# Altium PCB GaN_Driver.PcbDoc
Units mil, origin at the board's own origin, x right, y up, seen from the top; angles counter-clockwise.
Board outline 1968.5 x 1968.5 mil, 2 copper layers (Top Layer, Bottom Layer); 60 components, 34 nets, 166 pads, 272 vias.
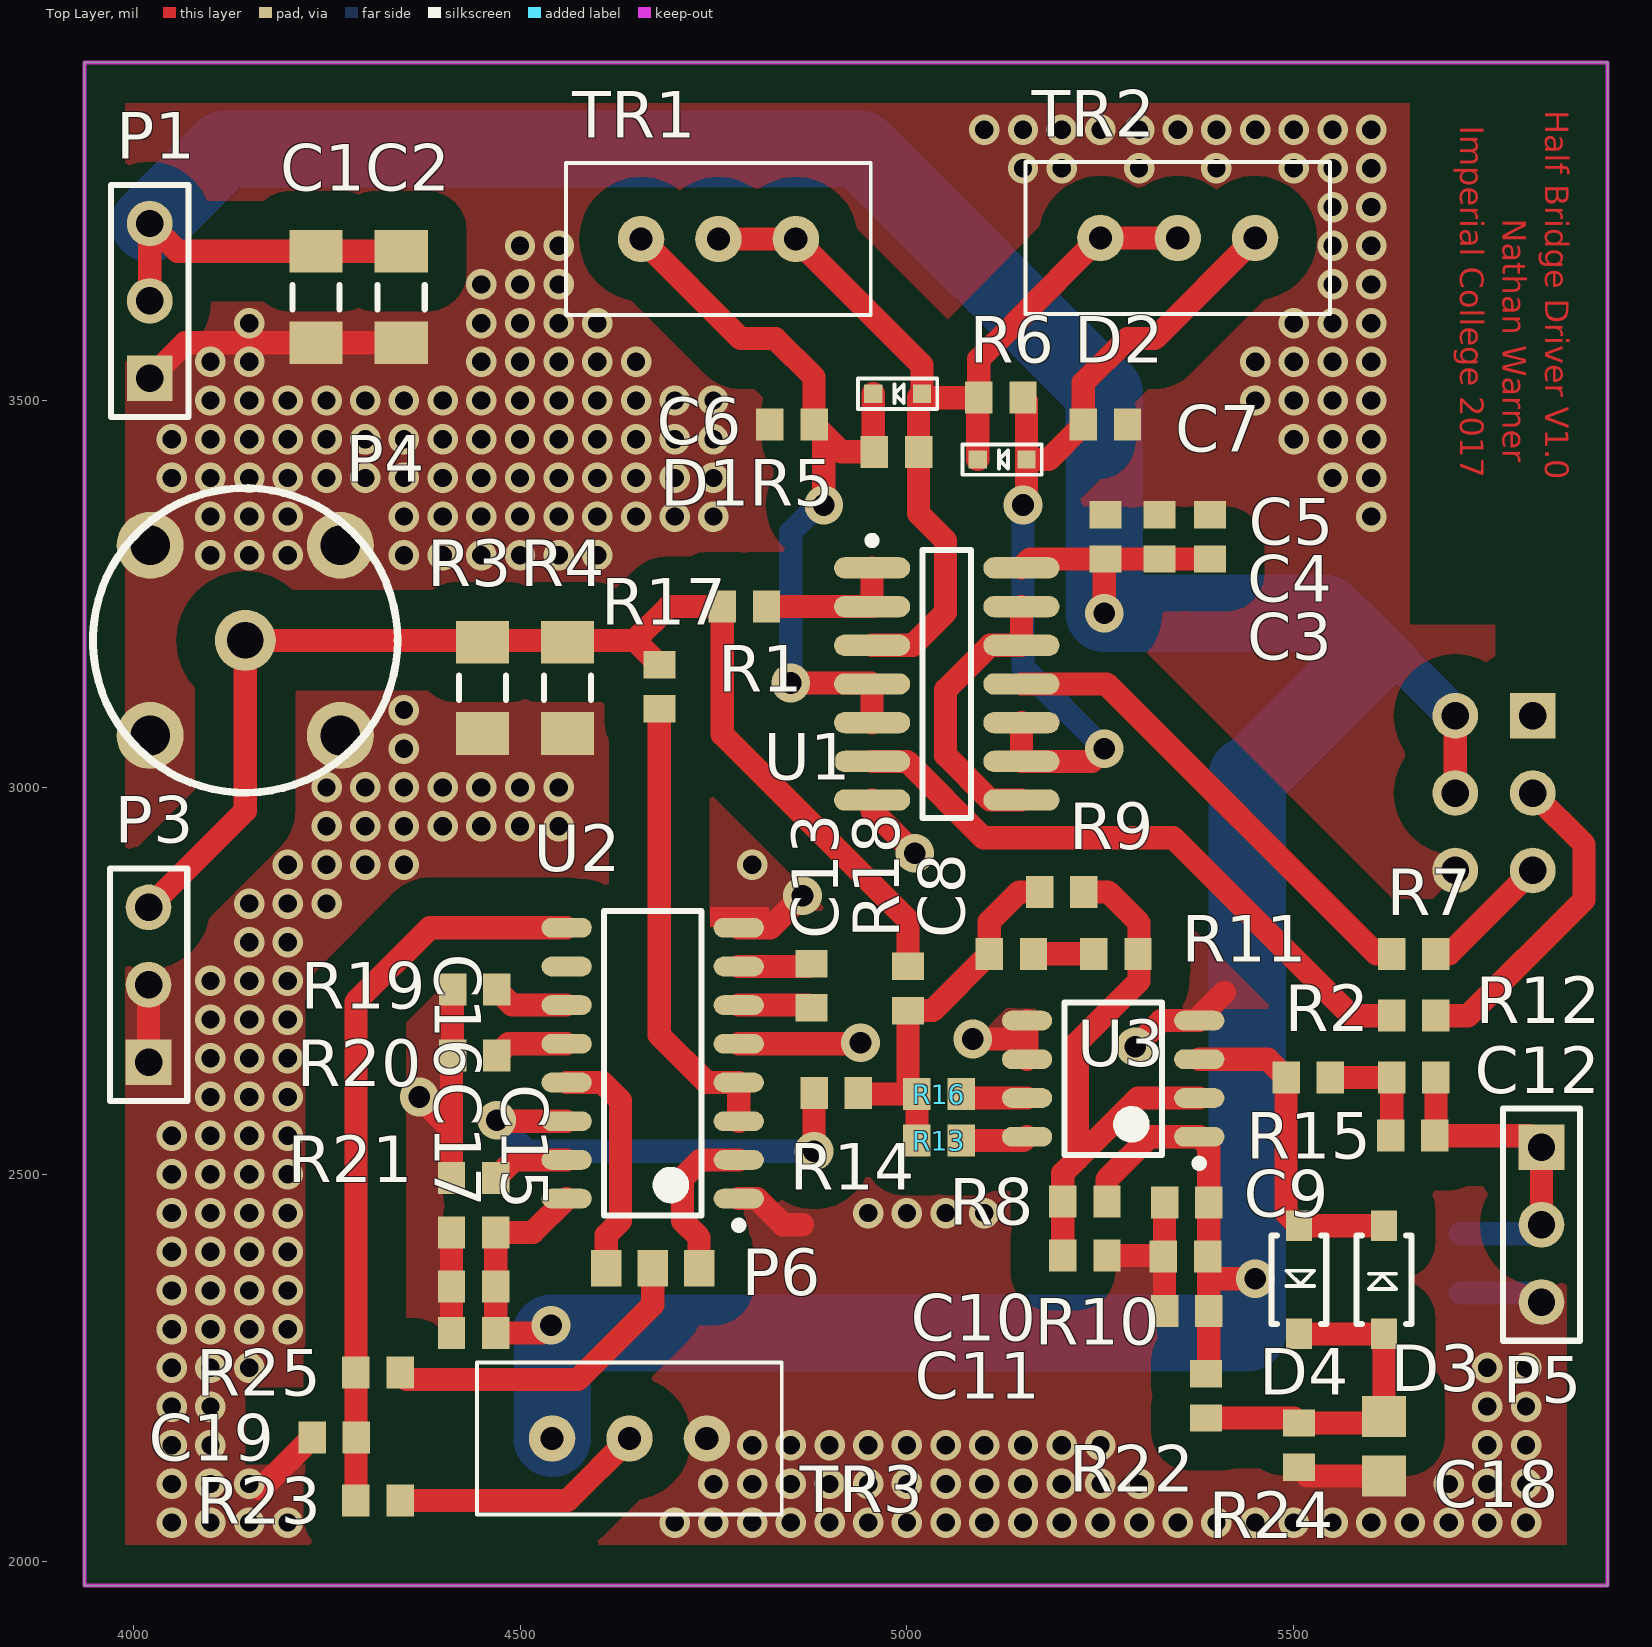
[diagram p0: Top Layer view]
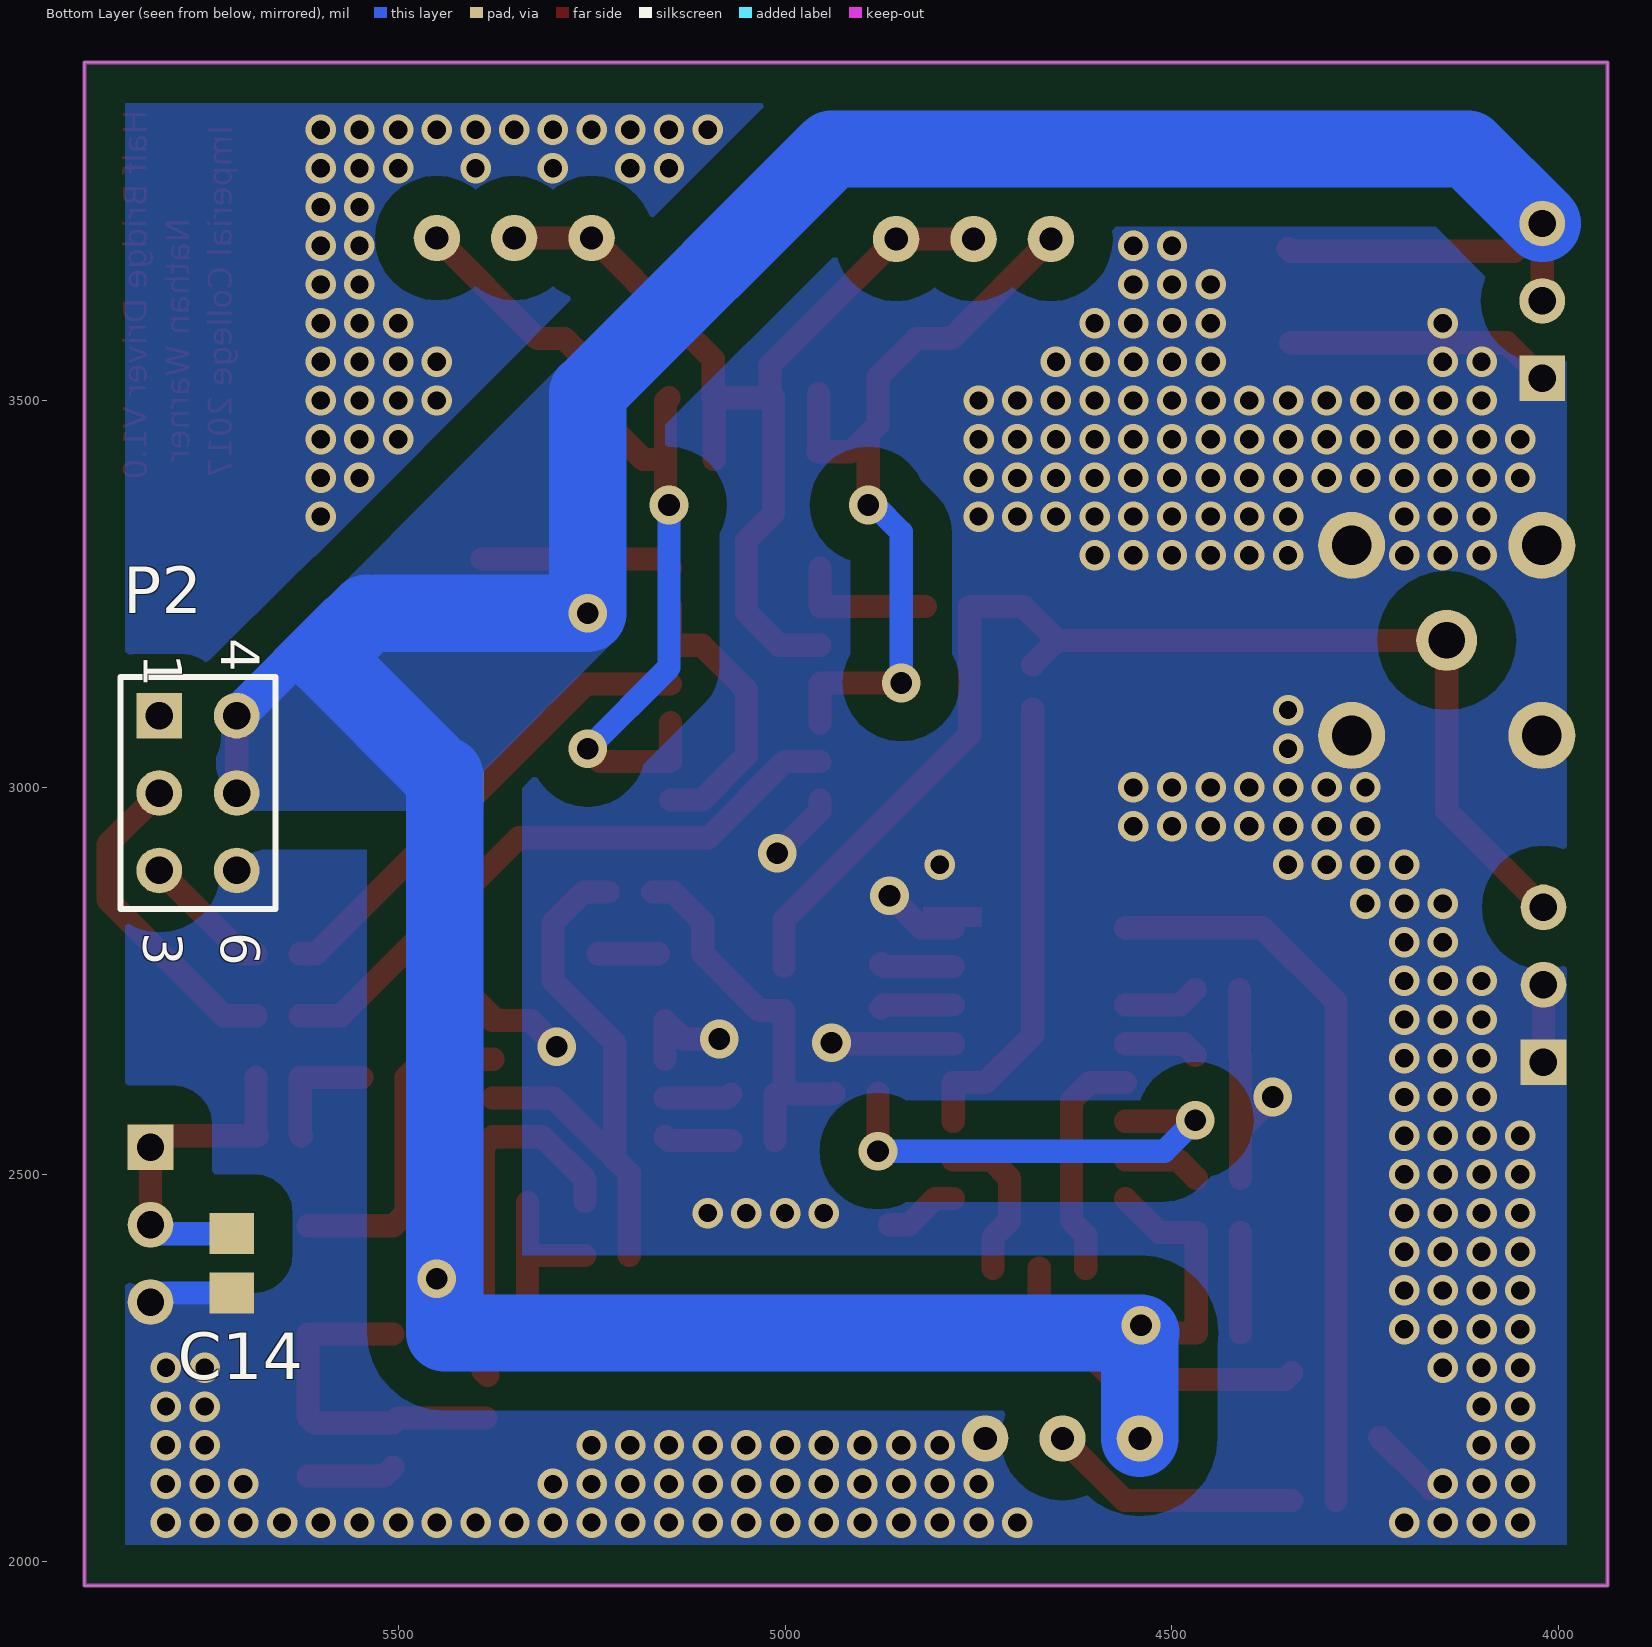
[diagram p1: Bottom Layer view, seen from below]

## Layer stack, top to bottom
Top Solder: solder mask 0.4, Solder Resist, Dk 3.5
Top Layer: signal copper 1.4
Dielectric 1: dielectric 12.6, FR-4, Dk 4.8
Bottom Layer: signal copper 1.4
Bottom Solder: solder mask 0.4, Solder Resist, Dk 3.5

## Board outline
3937.01,1968.5 3937.01,3937.01 5905.51,3937.01 5905.51,1968.5

## Design rules (kind name [scope] priority, off if disabled: settings)
Clearance Clearance_1 [InPolygon] p1: gap=50 ignorepadtopadclearanceinfootprint=FALSE
Clearance [All] p2: gap=10 ignorepadtopadclearanceinfootprint=FALSE
PolygonConnect [All] p1: connectstyle=Direct reliefconductorwidth=10 reliefentries=4 polygonreliefangle="90 Angle" airgapwidth=10
RoutingVias [All] p1: holewidth=28 width=50 viastyle="Through Hole" minholewidth=28 minwidth=50 maxholewidth=28 maxwidth=50
SolderMaskExpansion [All] p1: expansion=4
Width [All] p1: maxlimit=100 minlimit=30 preferedwidth=30
30 further rules are at their usual default settings.

## Classes and differential pairs
component class GaN_Dead_Time: C1 C2 C3 C4 C5 C6 C7 D1 D2 P1 P2 P3 P4 R1 R2 R3 R4 R5 R6 R7 TR1 TR2 U1
component class GaN_PLL: C8 C9 C10 C11 C12 C13 C14 C15 C16 C17 C18 C19 D3 D4 P5 P6 R8 R9 R10 R11 R12 R13 R14 R15 R16 R17 R18 R19 R20 R21 R22 R23 R24 R25 TR3 U2 U3

## Components (designator, comment, footprint, x,y, rotation, side; value= is the part's Value field where it differs from the comment)
C1 "Cap Semi" "1206 IPC Low Density" 4236.46,3633.7 r90 top value=100pF
C2 "Cap Semi" "1206 IPC Low Density" 4346.46,3633.7 r90 top value=100pF
C3 "Cap Semi" "0603 IPC Low Density" 5391.46,3323.7 r270 top value=100pF
C4 "Cap Semi" "0603 IPC Low Density" 5326.46,3323.7 r270 top value=100pF
C5 "Cap Semi" "0603 IPC Low Density" 5256.46,3323.7 r270 top value=100pF
C6 "Cap Semi" "0603 IPC Low Density" 4851.46,3468.7 r0 top value=100pF
C7 "Cap Semi" "0603 IPC Low Density" 5256.46,3468.7 r180 top value=100pF
C8 "Cap Semi" "0603 IPC Low Density" 5135,2785 r0 top value=100pF
C9 "Cap Semi" "0603 IPC Low Density" 5361.46,2463.7 r180 top value=100pF
C10 "Cap Semi" "0603 IPC Low Density" 5360,2393.7 r180 top value=100pF
C11 "Cap Semi" "0603 IPC Low Density" 5361.46,2323.7 r180 top value=100pF
C12 "Cap Semi" "0603 IPC Low Density" 5653.54,2550 r0 top value=100pF
C13 "Cap Semi" "0603 IPC Low Density" 4876.46,2743.7 r90 top value=100pF
C14 "Cap Semi" "0805 IPC Low Density" 5715,2385 r90 bottom value=100pF
C15 "Cap Semi" "0603 IPC Low Density" 4440,2425 r0 top value=100pF
C16 "Cap Semi" "0603 IPC Low Density" 4440,2355 r0 top value=100pF
C17 "Cap Semi" "0603 IPC Low Density" 4440,2295 r0 top value=100pF
C18 "Cap Semi" "0805 IPC Low Density" 5616.46,2148.7 r90 top value=100pF
C19 "Cap Semi" "0603 IPC Low Density" 4260,2160 r180 top value=100pF
D1 "PMEG2005EB" SOD-523 5019.45,3508.7 r180 top
D2 "PMEG2005EB" SOD-523 5154.45,3423.7 r180 top
D3 "MBR0530" SOD-123 5616.46,2363.7 r90 top
D4 "MBR0530" SOD-123 5506.46,2363.7 r270 top
P1 "Header 3" HDR1X3 4021.46,3528.7 r90 top
P2 "Header 3X2A" HDR2X3_CEN 5808.66,3092.76 r270 bottom
P3 "Header 3" HDR1X3 4020,2645 r90 top
P4 "BNC" BNC 4267.83,3312.83 r0 top
P5 "Header 3" HDR1X3 5820,2535 r270 top
P6 "2 WAY JUMPER" "2 WAY JUMPER" 4671.46,2378.7 r180 top
R1 "Res3" "RESISTOR 0603" 4790,3233.7 r0 top value=49R9
R2 "Res3" "RESISTOR 0603" 5655,2705 r0 top value=49R9
R3 "Res3" "RESISTOR 1206" 4451.46,3128.7 r90 top value=100R
R4 "Res3" "RESISTOR 1206" 4561.46,3128.7 r90 top value=100R
R5 "Res3" "RESISTOR 0603" 4986.46,3433.7 r180 top value=1K
R6 "Res3" "RESISTOR 0603" 5121.46,3503.7 r0 top value=1K
R7 "Res3" "RESISTOR 0603" 5655,2785 r0 top value=49R9
R8 "Res3" "RESISTOR 0603" 5230,2465 r180 top value=1K
R9 "Res3" "RESISTOR 0603" 5200,2865 r180 top value=100K
R10 "Res3" "RESISTOR 0603" 5230,2395 r0 top value=470
R11 "Res3" "RESISTOR 0603" 5270,2785 r180 top value=470
R12 "Res3" "RESISTOR 0603" 5655,2625 r180 top value=1K
R13 "Res3" "RESISTOR 0603" 5041.46,2543.7 r180 top value=0R
R14 "Res3" "RESISTOR 0603" 4908.54,2605 r0 top value=0R
R15 "Res3" "RESISTOR 0603" 5518.54,2625 r180 top value=1K
R16 "Res3" "RESISTOR 0603" 5041.46,2603.7 r180 top value=0R
R17 "Res3" "RESISTOR 0603" 4680,3130 r90 top value=0R
R18 "Res3" "RESISTOR 0603" 5001.46,2740.16 r270 top value=0R
R19 "Res3" "RESISTOR 0603" 4441.46,2738.7 r180 top value=1K
R20 "Res3" "RESISTOR 0603" 4441.46,2653.7 r180 top value=1K
R21 "Res3" "RESISTOR 0603" 4440,2495 r180 top value=1K
R22 "Res3" "RESISTOR 0603" 5386.46,2213.7 r270 top value=1K
R23 "Res3" "RESISTOR 0603" 4316.46,2078.7 r0 top value=1K
R24 "Res3" "RESISTOR 0603" 5506.46,2150.16 r270 top value=470
R25 "Res3" "RESISTOR 0603" 4316.46,2243.7 r180 top value=1K
TR1 "TRIMMER" 3296W 4756.46,3708.7 r180 top
TR2 "TRIMMER" 3296W 5350,3710 r0 top
TR3 "TRIMMER" 3296W 4641.46,2158.7 r0 top
U1 "MC74VHC132D" 751A-03_M 5051.46,3133.7 r0 top
U2 "74HCT9046A" SO16 4671.46,2643.7 r180 top
U3 "AD8611" SOIC8_N 5266.46,2623.7 r180 top

## Footprints (in the part's own frame and the unit in brackets; to place one, negate y for a bottom-side part, rotate by r counter-clockwise, add the part's x,y. Pads: shape width x height; smd on the part's side, far side on the other; paste and mask are expansions set on the pad)
"2 WAY JUMPER" [mm]
  rect 1x1.2 smd: 1(-1.524,0) 2(0,0) 3(1.524,0)
"0603 IPC Low Density" [mm] "Chip Resistor, 0603, Body 1.60x0.80mm, IPC Low Density"
  rect 0.9x1.05 smd: 1(-0.725,0) 2(0.725,0)
  body extent -0.87,-0.48 0.87,0.48, height 0.6
751A-03_M [mm] "SOIC, 14-Leads, Body 8.7x3.9mm, Pitch 1.27mm, IPC Low Density"
  oval 2.5x0.7 smd: 1(-2.45,3.81) 2(-2.45,2.54) 3(-2.45,1.27) 4(-2.45,0) 5(-2.45,-1.27) 6(-2.45,-2.54) 7(-2.45,-3.81) 8(2.45,-3.81) 9(2.45,-2.54) 10(2.45,-1.27) 11(2.45,0) 12(2.45,1.27) 13(2.45,2.54) 14(2.45,3.81)
  silkscreen extent -2.57,-4.4 0.8,4.83, body extent -2,-4.38 2,4.38, height 1.75
"0805 IPC Low Density" [mm] "Chip Resistor, 0805, Body 2.00x1.25mm, IPC Low Density"
  rect 1.35x1.45 smd: 1(-0.975,0) 2(0.975,0)
  body extent -1.1,-0.67 1.1,0.67, height 0.7
"1206 IPC Low Density" [mm] "Chip Resistor, 1206, Body 3.20x1.60mm, IPC Low Density"
  rect 1.4x1.75 smd: 1(-1.5,0) 2(1.5,0)
  silkscreen extent -0.4,-0.77 0.4,0.77, body extent -1.63,-0.82 1.63,0.82, height 0.7
3296W [mil] "Bourns Trimmer"
  round 60 hole 30: 1(-100,0) 2(0,0) 3(100,0)
  silkscreen extent -197,-98 197,98
BNC [mm]
  round 2.2 hole 1.3: GND(-6.24,-6.24) GND(-6.24,0) GND(0,-6.24) GND(0,0)
  round 2 hole 1.2: SIG(-3.12,-3.12)
  silkscreen extent -8.12,-8.12 1.88,1.88
HDR1X3 [mm] "Connector; Header; 3 Position"
  rect 1.5x1.5 hole 0.9: 1(0,0)
  round 1.5 hole 0.9: 2(2.54,0) 3(5.08,0)
  silkscreen extent -1.27,-1.27 6.35,1.27
HDR2X3_CEN [mm] "Connector; Header; 3x2 Position"
  rect 1.5x1.5 hole 0.9: 1(0,0)
  round 1.5 hole 0.9: 2(2.54,0) 3(5.08,0) 4(0,2.54) 5(2.54,2.54) 6(5.08,2.54)
  silkscreen extent -1.27,-1.27 6.35,3.81
"RESISTOR 0603" [mm] "Chip Resistor, 0603, Body 1.60x0.80mm, IPC Low Density"
  rect 0.9x1.05 smd: 1(-0.725,0) 2(0.725,0)
  body extent -0.87,-0.48 0.87,0.48, height 0.6
"RESISTOR 1206" [mm] "Chip Resistor, 1206, Body 3.20x1.60mm, IPC Low Density"
  rect 1.4x1.75 smd: 1(-1.5,0) 2(1.5,0)
  silkscreen extent -0.4,-0.77 0.4,0.77, body extent -1.63,-0.82 1.63,0.82, height 0.7
SO16 [mm] "SOIC, 16-Leads, Body 9.90x3.90mm, Pitch 1.27mm, IPC Low Density"
  oval 1.65x0.65 smd: 1(-2.825,4.445) 2(-2.825,3.175) 3(-2.825,1.905) 4(-2.825,0.635) 5(-2.825,-0.635) 6(-2.825,-1.905) 7(-2.825,-3.175) 8(-2.825,-4.445) 9(2.825,-4.445) 10(2.825,-3.175) 11(2.825,-1.905) 12(2.825,-0.635) 13(2.825,0.635) 14(2.825,1.905) 15(2.825,3.175) 16(2.825,4.445)
  silkscreen extent -2.95,-5 1.6,5.44, body extent -2,-5 2,5, height 1.75
SOD-123 [mm] "SODFL, 2-Leads, Body 1.60x3.75mm, IPC Low Density"
  rect 1x0.85 smd: 1(-1.775,0) 3(1.775,0)
  silkscreen extent -1.45,-0.9 1.45,0.9, body extent -1.32,-0.8 1.53,1, height 1.28
SOD-523 [mm] "Schottky Diode"
  rect 0.6x0.6 smd: 1(0,0) 3(1.6,0)
  silkscreen extent -0.5,-0.5 2.1,0.5
SOIC8_N [mm] "SOIC, 8-Leads, Body 4.90x3.90mm, Pitch 1.27mm, IPC Low Density"
  oval 1.65x0.65 smd: 1(-2.825,1.905) 2(-2.825,0.635) 3(-2.825,-0.635) 4(-2.825,-1.905) 5(2.825,-1.905) 6(2.825,-0.635) 7(2.825,0.635) 8(2.825,1.905)
  silkscreen extent -2.95,-2.5 1.6,2.9, body extent -2,-2.5 2,2.5, height 1.75

## Part data
C1 C2 C3 C4 C5 C6 C7 C8 C9 C10 C11 C12 C13 C14 C15 C16 C17 C18 C19: "Capacitor (Semiconductor SIM Model)", LatestRevisionDate=29-May-2009, LatestRevisionNote="IPC-7351 Footprint Added.", PackageDescription="Chip Capacitor", PackageReference=C1206, Published=8-Jun-2000, Publisher="Altium Limited"
D1 D2: "Schottky Diode  SOD-523"
D3 D4: "Schottky Rectifier, SOD-123"
P1 P3 P5: "Header, 3-Pin", LatestRevisionDate=17-Jul-2002, LatestRevisionNote="Re-released for DXP Platform.", Publisher="Altium Limited"
P2: "Header, 3-Pin, Dual row", LatestRevisionDate=17-Jul-2002, LatestRevisionNote="Re-released for DXP Platform.", Publisher="Altium Limited"
P4: "Straight 50O Through Hole BNC Connector", PackageDocument="Rev. A, 16-Jun-1997", ComponentLink1Description="Manufacturer Link", ComponentLink1URL=http://www.amphenolrf.com/, DatasheetDocument=30-May-2003, DrillSize="Corresponds to nominal value.", LatestRevisionDate=15-Jul-2004, LatestRevisionNote="Component Replaced.", PackageReference=908-21103, PCB_Layout="Complies with manufacturer's recommendation.", Published=15-Jul-2004, Publisher="Altium Limited"
P6: library part "Header 3", LatestRevisionDate=17-Jul-2002, LatestRevisionNote="Re-released for DXP Platform.", Publisher="Altium Limited"
R1 R2 R3 R4 R5 R6 R7 R8 R9 R10 R11 R12 R13 R14 R15 R16 R17 R18 R19 R20 R21 R22 R23 R24 R25: "Resistor", LatestRevisionDate=29-May-2009, LatestRevisionNote="IPC-7351 Footprint Added.", PackageDescription="Chip Resistor", PackageReference=J1-0603, Published=8-Jun-2000, Publisher="Altium Limited"
TR1 TR2 TR3: library part "TRIMMER 3296W"
U1: "Quad 2-Input NAND Schmitt Trigger", Code_IPC=SOIC127P600-14, Code_JEDEC=MS-012-AB, ComponentLink1Description="Manufacturer Link", ComponentLink1URL=http://www.onsemi.com/, ComponentLink2Description=Datasheet, ComponentLink2URL=http://www.onsemi.com/pub/Collateral/MC74VHC132-D.PDF, DatasheetVersion=1997, LatestRevisionDate=13-Apr-2006, LatestRevisionNote="IPC-7351 Footprint Added.", PackageDescription="14-Pin Small Outline Integrated Circuit 1.27 mm Pitch", PackageReference=751A-03, Published=15-Apr-2002, Publisher="Altium Limited"
U2: "Phase Locked Loops - PLL PLL BAND GAP CNTRL W/VCO"
U3: "Ultrafast, 4 ns Single-Supply Comparators"

## Via types
v1: diameter 39.37, hole 23.62, Top Layer to Bottom Layer, 257 vias
v2: diameter 50, hole 28, Top Layer to Bottom Layer, 15 vias

## Nets (pads, with @x,y where several pads share a name; then routed paths per layer and width w, separated by ;. In a path a pad name is that pad's centre, name@x,y a point inside that pad or via, vN(x,y) a via of type N, cw(c..) or ccw(c..) an arc to the next point about the centre after c; other vN are vias at no path point)
+5V: C1.2 C2.2 C3.2 C4.2 C5.2 C9.1 C10.1 C11.1 C15.2 C16.2 C17.2 P1.2 P1.3 P2.4 P2.5 R8.1 R22.1 TR3.1 U1.14 U2.16 U3.1 | length 5967.4
  Top Layer w30: P1.2 P1.3 4057.4,3692.76 C1.2 C2.2 C2.2@4350,3696.3 ; v2(4540,2305) 4530,2295 C17.2 C16.2 C15.2 4516.54,2425 U2.16 ; U1.14 5159.37,3295.16 C5.2 ; v2(5255,3225) 5255,3293.7 C5.2 ; R8.1 5258.54,2493.54 5313.7,2548.7 U3.1 5390,2536.38 C9.1 5390,2365 ; R22.1@5384.21,2240 R22.1 5390,2245.79 C11.1 5390,2365 ; C3.2 C4.2 C5.2 ; v2(5450,2365) 5390,2365 ; P2.5 P2.4
  Bottom Layer w50: 5540,3225 5576.42,3225 P2.4
  Bottom Layer w100: P1.3 4117.76,3825 4940,3825 5255,3510 v2(5255,3225) 5525,3225 ; TR3.1 4541.46,2293.54 4540,2295 5440,2295 5440,3015 5441.79,3013.21 5596.79,3168.21 5540,3225
DT: D1.1 D2.3 R5.1 R6.1 TR1.1 TR1.2 TR2.1 TR2.2 U1.3 | length 1306.6
  Top Layer w30: TR1.2 TR1.1 5019.45,3545.71 D1.1 ; U1.3 5007.6,3183.7 5050,3226.1 5050,3318.9 5015,3353.9 R5.1 5015,3504.25 D1.1 ; D2.3 5091.46,3502.24 R6.1 ; TR2.1@5248.8,3711.18 5139.72,3600 5092.91,3553.2 R6.1 ; TR2.1 TR2.2 ; D1.1 5024.45,3503.7 R6.1
GND: C1.1 C2.1 C3.1 C4.1 C5.1 C6.1 C7.1 C9.2 C10.2 C11.2 C14.1 C15.1 C16.1 C17.1 C18.1 C19.2 P1.1 P2.6 P3.1 P3.2 P4.GND P5.3 R3.1 R4.1 R10.2 R19.2 R20.2 R21.2 R24.2 TR3.3 U1.7 U2.1 U2.5 U2.8 U3.4 U3.5 U3.6 | length 2130.3
  Top Layer w30: P3.1 P3.2 ; P1.1 4067.4,3574.65 C1.1 C2.1 ; v1@4165,2093.54 C19.2 ; v2(4370,2600) 4411.46,2558.54 ; C17.1 C16.1 C15.1 ; R21.2 4411.46,2558.54 ; R19.2 R20.2 4411.46,2652.24 4411.46,2558.54 ; U2.1 4806.3,2468.7 4840,2435 4865,2435 ; U2.5 4938.7,2668.7 v2(4940,2670) ; U2.8 4823.7,2818.7 v2(4865,2860) ; U1.7 4955,2970 v2(5010,2915) ; v2(5085,2675) 5131.54,2675 U3.5 U3.6 ; R10.2 5330.16,2395 C10.2 ; v2(5295,2665) 5328.7,2698.7 U3.4 5377.68,2702.68 5410,2735 ; C11.2 C9.2 ; R24.2 5517.76,2110.32 C18.1
  Bottom Layer w30: C14.1 5808.39,2346.61 P5.3
  other v1: 4050,2050 4100,2050 4150,2050 4200,2050 4700,2050 4750,2050 4800,2050 4850,2050 4900,2050 4950,2050 5000,2050 5050,2050 5100,2050 5150,2050 5200,2050 5250,2050 5300,2050 5350,2050 5400,2050 5450,2050 5500,2050 5550,2050 5600,2050 5650,2050 5700,2050 5750,2050 5800,2050 4050,2100 4100,2100 4150,2100 4750,2100 4800,2100 4850,2100 4900,2100 4950,2100 5000,2100 5050,2100 5100,2100 5150,2100 5200,2100 5250,2100 5300,2100 5700,2100 5750,2100 5800,2100 4050,2150 4100,2150 4800,2150 4850,2150 4900,2150 4950,2150 5000,2150 5050,2150 5100,2150 5150,2150 5200,2150 5250,2150 5750,2150 5800,2150 4050,2200 4100,2200 5750,2200 5800,2200 4050,2250 4100,2250 4150,2250 5750,2250 5800,2250 4050,2300 4100,2300 4150,2300 4200,2300 4050,2350 4100,2350 4150,2350 4200,2350 4050,2400 4100,2400 4150,2400 4200,2400 4050,2450 4100,2450 4150,2450 4200,2450 4950,2450 5000,2450 5050,2450 5100,2450 4050,2500 4100,2500 4150,2500 4200,2500 4050,2550 4100,2550 4150,2550 4200,2550 4100,2600 4150,2600 4200,2600 4100,2650 4150,2650 4200,2650 4100,2700 4150,2700 4200,2700 4100,2750 4150,2750 4200,2750 4150,2800 4200,2800 4150,2850 4200,2850 4250,2850 4200,2900 4250,2900 4300,2900 4350,2900 4800,2900 4250,2950 4300,2950 4350,2950 4400,2950 4450,2950 4500,2950 4550,2950 4250,3000 4300,3000 4350,3000 4400,3000 4450,3000 4500,3000 4550,3000 4350,3050 4350,3100 4100,3300 4150,3300 4200,3300 4350,3300 4400,3300 4450,3300 4500,3300 4550,3300 4600,3300 4100,3350 4150,3350 4200,3350 4350,3350 4400,3350 4450,3350 4500,3350 4550,3350 4600,3350 4650,3350 4700,3350 4750,3350 5600,3350 4050,3400 4100,3400 4150,3400 4200,3400 4250,3400 4300,3400 4350,3400 4400,3400 4450,3400 4500,3400 4550,3400 4600,3400 4650,3400 4700,3400 4750,3400 5550,3400 5600,3400 4050,3450 4100,3450 4150,3450 4200,3450 4250,3450 4300,3450 4350,3450 4400,3450 4450,3450 4500,3450 4550,3450 4600,3450 4650,3450 4700,3450 4750,3450 5500,3450 5550,3450 5600,3450 4100,3500 4150,3500 4200,3500 4250,3500 4300,3500 4350,3500 4400,3500 4450,3500 4500,3500 4550,3500 4600,3500 4650,3500 4700,3500 4750,3500 5450,3500 5500,3500 5550,3500 5600,3500 4100,3550 4150,3550 4450,3550 4500,3550 4550,3550 4600,3550 4650,3550 5450,3550 5500,3550 5550,3550 5600,3550 4150,3600 4450,3600 4500,3600 4550,3600 4600,3600 5500,3600 5550,3600 5600,3600 4450,3650 4500,3650 4550,3650 5550,3650 5600,3650 4500,3700 4550,3700 5550,3700 5600,3700 5550,3750 5600,3750 5150,3800 5200,3800 5300,3800 5400,3800 5500,3800 5550,3800 5600,3800 5100,3850 5150,3850 5200,3850 5250,3850 5300,3850 5350,3850 5400,3850 5450,3850 5500,3850 5550,3850 5600,3850
HIGH_IN: C6.2 D1.3 R5.2 TR1.3 U1.4 U1.5 | length 1025.6
  Top Layer w30: TR1.3 4785.16,3580 4830,3580 4880,3530 C6.2 C6.2@4892.5,3456.2 ; v2(4850,3135) 4953.7,3135 U1.4 U1.5 ; v2(4892.5,3365) C6.2@4892.5,3456.2 ; D1.3 4956.46,3435.16 R5.2 4915,3433.7 C6.2@4892.5,3456.2
  Bottom Layer w30: v2(4850,3135) 4850,3330 4885,3365 v2(4892.5,3365)
HIGH_OUT: R2.1 U1.6 | length 807.6
  Top Layer w30: U1.6 5000.2,3033.7 5098.9,2935 5343.9,2935 5573.9,2705 R2.1
INV_PWM_OUT: P2.3 R7.2 | length 169.8
  Top Layer w30: R7.2 5700.91,2785 P2.3
LOW_IN: C7.2 D2.1 R6.2 TR2.3 U1.9 U1.10 | length 1110.6
  Top Layer w30: U1.10 U1.9 5238.7,3033.7 v2(5255,3050) ; v2(5150,3365) 5154.45,3369.45 D2.1 ; R6.2 5154.45,3499.25 D2.1 ; TR2.3 5320,3580 5285,3580 5227.91,3522.91 C7.2 5182.91,3423.7 D2.1
  Bottom Layer w30: v2(5150,3365) 5150,3155 v2(5255,3050)
LOW_INT: U1.8 U1.12 U1.13 | length 378.4
  Top Layer w30: U1.8 5107.64,2983.7 5050,3041.34 5050,3126.26 5107.44,3183.7 U1.12 U1.13
LOW_OUT: R7.1 U1.11 | length 623
  Top Layer w30: U1.11 5257.91,3133.7 5606.61,2785 R7.1
NetC8_1: C8.1 R9.2 R13.2 R14.2 R16.2 R18.2 | length 504.8
  Top Layer w30: R14.2 4938.39,2603.7 4995,2603.7 ; R13.2 R16.2 4995,2603.7 ; R9.2 5145,2865 5106.46,2826.46 C8.1 5033.07,2711.61 R18.2 5001.46,2610.16 4995,2603.7
NetC8_2: C8.2 R11.2 | length 77.9
  Top Layer w30: C8.2 R11.2
NetC12_1: C12.1 R12.2 R15.1 | length 155
  Top Layer w30: R15.1 R12.2 5626.46,2551.46 C12.1
NetC12_2: C12.2 C14.2 P5.1 P5.2 R12.1 | length 429.5
  Top Layer w30: R12.1 5683.54,2551.46 C12.2 5805,2550 P5.1 P5.2
  Bottom Layer w30: C14.2 5808.39,2423.39 P5.2
NetC13_1: C13.1 U2.6 | length 95.2
  Top Layer w30: U2.6 4872.91,2718.7 C13.1
NetC13_2: C13.2 U2.7 | length 95.2
  Top Layer w30: U2.7 4872.91,2768.7 C13.2
NetC18_2: C18.2 D3.1 D4.3 R22.2 R24.1 | length 452.9
  Top Layer w30: R22.2 5500,2185.16 R24.1 5608.07,2178.7 C18.2 D3.1 D4.3
NetD3_3: D3.3 D4.1 R15.2 U3.3 | length 430.4
  Top Layer w30: U3.3 5466.3,2648.7 R15.2 5490,2450.04 D4.1 D3.3
NetP6_2: P6.2 R25.1 | length 417.3
  Top Layer w30: R25.1 4353.7,2235 4575,2235 4671.46,2331.46 P6.2
NetR1_2: R1.2 U1.1 U1.2 | length 186.5
  Top Layer w30: R1.2 U1.2 U1.1
NetR8_2: R8.2 R9.1 R10.1 R11.1 U3.2 | length 749.3
  Top Layer w30: R10.1 R8.2 5201.46,2501.46 5215,2515 5220,2520 ; R9.1 5260,2865 5300,2825 5300,2750 5220,2670 5220,2520 ; 5298.54,2598.86 5298.7,2598.7 ; U3.2 5298.7,2598.7 ; 5220,2520 5298.7,2598.7
NetR13_1: R13.1 U3.8 | length 87.3
  Top Layer w30: R13.1 5150.24,2543.7 U3.8
NetR14_1: R14.1 U2.14 | length 592.3
  Top Layer w30: v2(4470,2570) 4471.3,2568.7 U2.14 ; v2(4880,2530) R14.1
  Bottom Layer w30: v2(4470,2570) 4510,2530 v2(4880,2530)
NetR16_1: R16.1 U3.7 | length 87.3
  Top Layer w30: R16.1 5075,2598.7 U3.7
NetR17_1: R17.1 U2.3 U2.4 | length 599.5
  Top Layer w30: R17.1 4680,2680 4741.3,2618.7 U2.4 U2.3
NetR19_1: R19.1 U2.11 | length 98.5
  Top Layer w30: R19.1 4490,2718.7 U2.11
NetR20_1: R20.1 U2.12 | length 96.4
  Top Layer w30: R20.1 4485,2668.7 U2.12
NetR21_1: R21.1 U2.15 | length 101.5
  Top Layer w30: R21.1 4492.24,2518.7 U2.15
NetR23_2: R23.2 TR3.2 | length 329.6
  Top Layer w30: R23.2 4561.46,2078.7 TR3.2
PC1_OUT: P6.1 U2.2 | length 207.7
  Top Layer w30: P6.1 4731.46,2418.54 4710,2440 4710,2495 4733.7,2518.7 U2.2
PC2_OUT: P6.3 U2.13 | length 303.6
  Top Layer w30: U2.13 4606.3,2618.7 4630,2595 4630,2440 4611.46,2421.46 P6.3
PWM_OUT: P2.2 R2.2 | length 418.8
  Top Layer w30: R2.2 5725,2705 5875,2855 5875,2926.42 P2.2
SIG_GEN: P3.3 P4.SIG R1.1 R3.2 R4.2 R17.2 R18.1 | length 1640.2
  Top Layer w30: P3.3 4145,2970 P4.SIG 4648.54,3190 ; R17.2 4648.54,3190 ; R18.1 5001.46,2828.54 4761.46,3068.54 R1.1 4692.24,3233.7 4648.54,3190
VCO_IN: C19.1 R23.1 R25.2 U2.9 | length 956.2
  Top Layer w30: R23.1 R25.2 4287.91,2722.91 4383.7,2818.7 U2.9
VDD: 
pads on no net: P2.1 U2.10

## Polygon pours and split planes (outlines as drawn)
+5V on Bottom Layer "Top Layer-No Net" (solid, pour order 2): 5285,3550 5735,3100 5735,2970 5390,2970 5390,3020 5215,3195 5285,3265
GND on Bottom Layer "Top Layer-No Net" (solid, pour order 4): 3937.01,3937.01 5905.51,3937.01 5905.51,1968.5 3937.01,1968.5
GND on Top Layer "GND_L01_P006" (solid, remove dead copper, pour order 6): 3937.01,3937.01 5905.51,3937.01 5905.51,1968.5 3937.01,1968.5

## Keep-outs
Keep-Out Layer:
  the board outline again, w5

## Other copper
Top Layer:
  rectangle net GND: 4745.31,2819.41 4821.8,2845.39
  text "Half Bridge Driver V1.0" at 5825,3875 h30 r270
  text "Imperial College 2017" at 5715,3855 h30 r270
  text "Nathan Warner" at 5770,3735 h30 r270

## Text inside footprints (layer, text, board x,y; h text height)
P2: Bottom Overlay "6" at 5728.66,2812.76 h50 r90; Bottom Overlay "3" at 5828.66,2812.76 h50 r90; Bottom Overlay "1" at 5828.66,3172.76 h50 r90; Bottom Overlay "4" at 5728.66,3192.76 h50 r90